# EAGLE board backplane-5 (EAGLE 8.3.1)
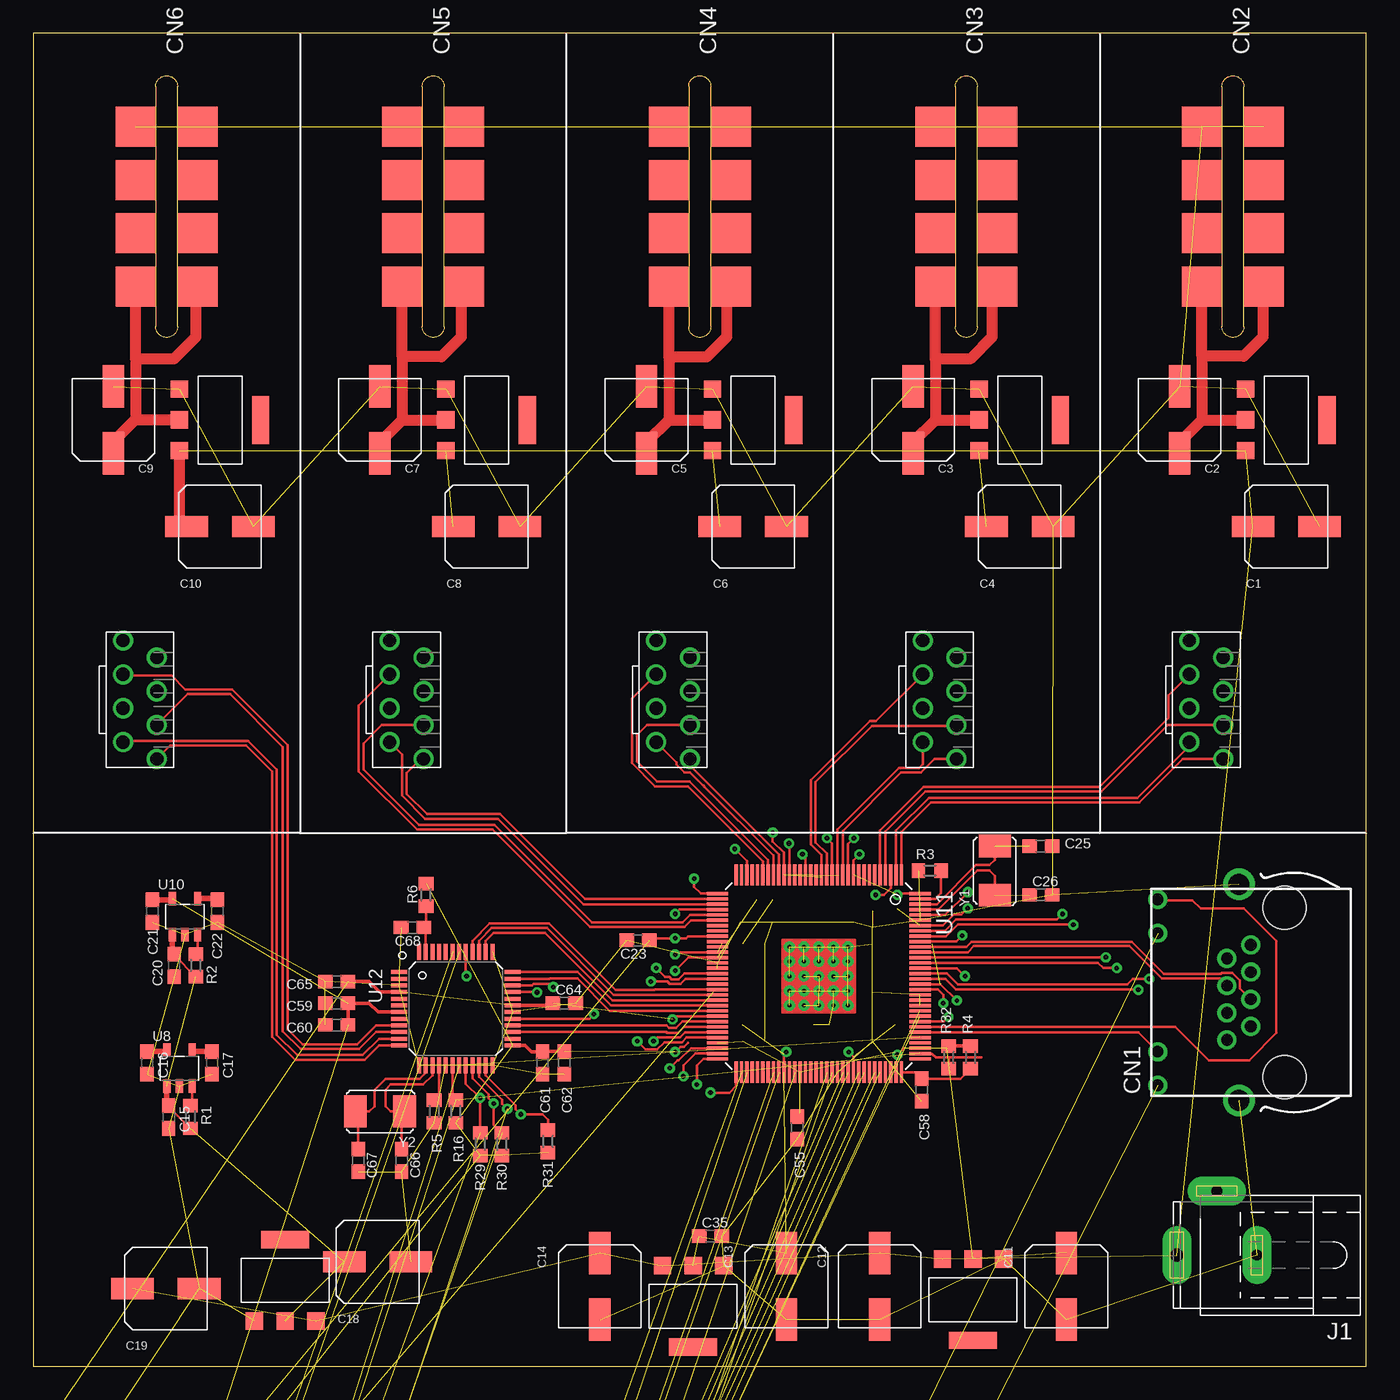
[diagram p0: board, top side]
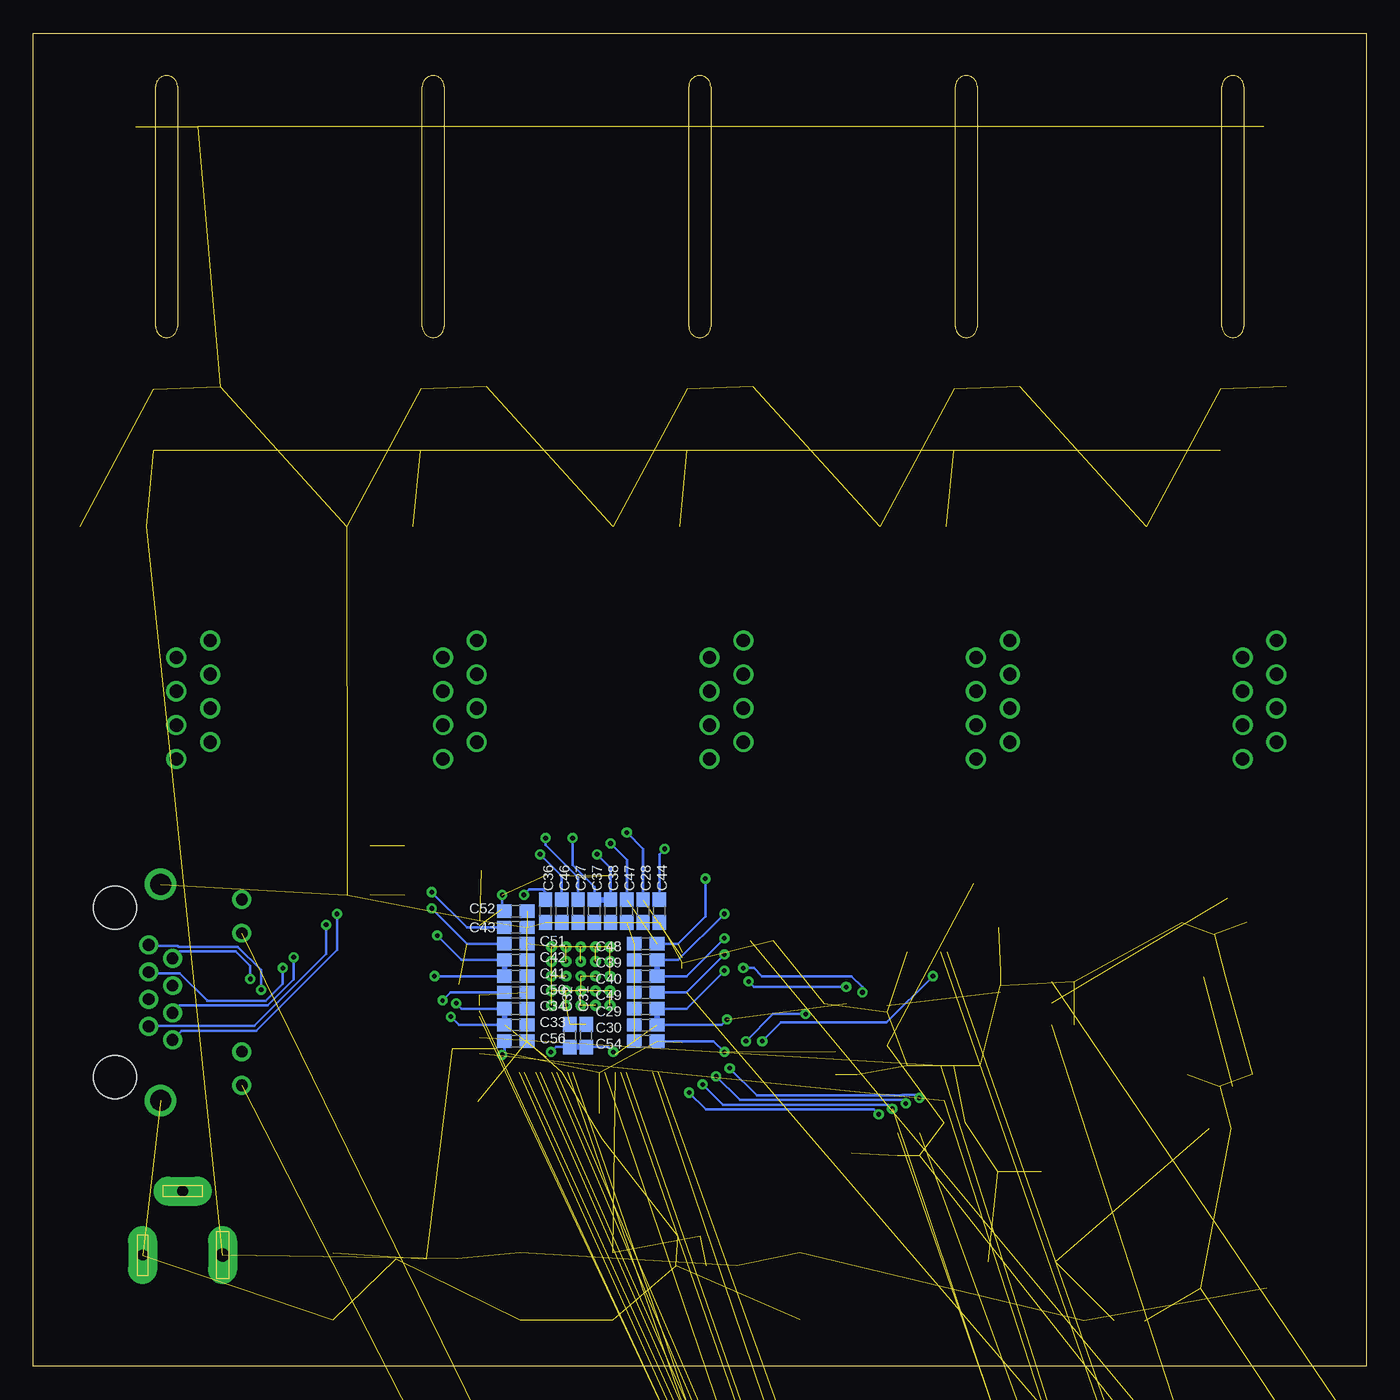
[diagram p1: board, bottom side, seen from below]

Size 100 x 100 mm. Coordinates in mm from the lower left corner, seen from the top.
Outline: 0,0 100,0 100,100 0,100 0,0
Copper layers (1*16): Top 0.035mm / dielectric 1.5mm / Bottom 0.035mm
Design rules "default *": minimum track width 8mil, minimum drill 0.35mm, track to track 6mil, track to pad 6mil, pad to pad 6mil, via to via 6mil, smd to smd 6mil, copper to edge 10mil, drill to drill 6mil, minimum pad ring 10mil, minimum via ring 8mil, stop-mask expansion 4mil, vias tented up to drill 0mil, thermal gap 10mil

## Footprints (pad centres in the part's own frame; a part is rotated, then mirrored left to right if it is on the bottom)
CAP-D6.3 = smd 3.2 x 1.6: N 2.5,0; P -2.5,0
C0603 = smd 1.1 x 1: 1 -0.85,0; 2 0.85,0
0603 = smd 1.1 x 1: 1 -0.85,0; 2 0.85,0
0805 = smd 1.3 x 1.5: 1 -0.95,0; 2 0.95,0
RJ45JACK90 = drill 0.889 pad 1.422: 1 3.556,2.54; 2 2.54,4.318; 3 1.524,2.54; 4 0.508,4.318; 5 -0.508,2.54; 6 -1.524,4.318; 7 -2.54,2.54; 8 -3.556,4.318; 9 -6.985,9.525; 10 -4.445,9.525; 11 4.445,9.525; 12 6.985,9.525 | drill 1.575 pad 2.286: S@1 -8.103,3.429; S@2 8.103,3.429 | hole 3.251: 6.35,0; -6.35,0
4PINCONN-FEMALE-1.6 = smd 3 x 3: 1@1 -6,-2.325; 1@2 -6,2.325; 2@1 -2,-2.325; 2@2 -2,2.325; 3@1 2,-2.325; 3@2 2,2.325; 4@1 6,-2.325; 4@2 6,2.325
SPC4077 = drill 0.8 pad 2.184 long: 1 -3,0; 2 0,-4.8 | drill 1 pad 2.184 long: 3 3,0
1X03 = drill 1.016 long: 1 -2.54,0; 2 0,0; 3 2.54,0
1210 = smd 1.6 x 2.7: 1 -1.4,0; 2 1.4,0
CHIPLED_0603 = smd 0.8 x 0.8: A 0,-0.75; C 0,0.75
R0603 = smd 1 x 1.1: 1 -0.85,0; 2 0.85,0
RJ45MALE = drill 1: 1 -4.445,-1.27; 2 -3.175,1.27; 3 -1.905,-1.27; 4 -0.635,1.27; 5 0.635,-1.27; 6 1.905,1.27; 7 3.175,-1.27; 8 4.445,1.27
SB = smd 0.787 x 0.787: 1 -1.448,0; 2 0,0; 3 1.448,0
SOT223 = smd 1.3 x 1.3: 1 -2.3,-3.05; 2 0,-3.05; 3 2.3,-3.05 | smd 3.6 x 1.3: 4 0,3.05
SOT23-5 = smd 0.55 x 1: 1 -0.95,-1.35; 2 0,-1.35; 3 0.95,-1.35; 4 0.95,1.35; 5 -0.95,1.35
TQFP-128 = smd 1.6 x 0.25: P$1 -7.6,6.2; P$2 -7.6,5.8; P$3 -7.6,5.4; P$4 -7.6,5; P$5 -7.6,4.6; P$6 -7.6,4.2; P$7 -7.6,3.8; P$8 -7.6,3.4; P$9 -7.6,3; P$10 -7.6,2.6; P$11 -7.6,2.2; P$12 -7.6,1.8; P$13 -7.6,1.4; P$14 -7.6,1; P$15 -7.6,0.6; P$16 -7.6,0.2; P$17 -7.6,-0.2; P$18 -7.6,-0.6; P$19 -7.6,-1; P$20 -7.6,-1.4; P$21 -7.6,-1.8; P$22 -7.6,-2.2; P$23 -7.6,-2.6; P$24 -7.6,-3; P$25 -7.6,-3.4; P$26 -7.6,-3.8; P$27 -7.6,-4.2; P$28 -7.6,-4.6; P$29 -7.6,-5; P$30 -7.6,-5.4; P$31 -7.6,-5.8; P$32 -7.6,-6.2; P$65 7.2,-6.2; P$66 7.2,-5.8; P$67 7.2,-5.4; P$68 7.2,-5; P$69 7.2,-4.6; P$70 7.2,-4.2; P$71 7.2,-3.8; P$72 7.2,-3.4; P$73 7.2,-3; P$74 7.2,-2.6; P$75 7.2,-2.2; P$76 7.2,-1.8; P$77 7.2,-1.4; P$78 7.2,-1; P$79 7.2,-0.6; P$80 7.2,-0.2; P$81 7.2,0.2; P$82 7.2,0.6; P$83 7.2,1; P$84 7.2,1.4; P$85 7.2,1.8; P$86 7.2,2.2; P$87 7.2,2.6; P$88 7.2,3; P$89 7.2,3.4; P$90 7.2,3.8; P$91 7.2,4.2; P$92 7.2,4.6; P$93 7.2,5; P$94 7.2,5.4; P$95 7.2,5.8; P$96 7.2,6.2 | smd 0.25 x 1.6: P$33 -6.2,-7.6; P$34 -5.8,-7.6; P$35 -5.4,-7.6; P$36 -5,-7.6; P$37 -4.6,-7.6; P$38 -4.2,-7.6; P$39 -3.8,-7.6; P$40 -3.4,-7.6; P$41 -3,-7.6; P$42 -2.6,-7.6; P$43 -2.2,-7.6; P$44 -1.8,-7.6; P$45 -1.4,-7.6; P$46 -1,-7.6; P$47 -0.6,-7.6; P$48 -0.2,-7.6; P$49 0.2,-7.6; P$50 0.6,-7.6; P$51 1,-7.6; P$52 1.4,-7.6; P$53 1.8,-7.6; P$54 2.2,-7.6; P$55 2.6,-7.6; P$56 3,-7.6; P$57 3.4,-7.6; P$58 3.8,-7.6; P$59 4.2,-7.6; P$60 4.6,-7.6; P$61 5,-7.6; P$62 5.4,-7.6; P$63 5.8,-7.6; P$64 6.2,-7.6; P$97 6.2,7.6; P$98 5.8,7.6; P$99 5.4,7.6; P$100 5,7.6; P$101 4.6,7.6; P$102 4.2,7.6; P$103 3.8,7.6; P$104 3.4,7.6; P$105 3,7.6; P$106 2.6,7.6; P$107 2.2,7.6; P$108 1.8,7.6; P$109 1.4,7.6; P$110 1,7.6; P$111 0.6,7.6; P$112 0.2,7.6; P$113 -0.2,7.6; P$114 -0.6,7.6; P$115 -1,7.6; P$116 -1.4,7.6; P$117 -1.8,7.6; P$118 -2.2,7.6; P$119 -2.6,7.6; P$120 -3,7.6; P$121 -3.4,7.6; P$122 -3.8,7.6; P$123 -4.2,7.6; P$124 -4.6,7.6; P$125 -5,7.6; P$126 -5.4,7.6; P$127 -5.8,7.6; P$128 -6.2,7.6 | drill 0.3: P$129 0,0; P$130 1.1,0; P$131 2.2,0; P$132 -1.1,0; P$133 -2.2,0; P$134 0,1.1; P$135 0,2.2; P$136 -1.1,2.2; P$137 -2.2,2.2; P$138 -2.2,1.1; P$139 -1.1,1.1; P$140 1.1,2.2; P$141 1.1,1.1; P$142 2.2,2.2; P$143 2.2,1.1; P$144 2.2,-1.1; P$145 1.1,-1.1; P$146 0,-1.1; P$147 -1.1,-1.1; P$148 -2.2,-1.1; P$149 -2.2,-2.2; P$150 -1.1,-2.2; P$151 0,-2.2; P$152 1.1,-2.2; P$153 2.2,-2.2
LQFP-48 = smd 0.3 x 1.2: 1 -2.75,-4.25; 2 -2.25,-4.25; 3 -1.75,-4.25; 4 -1.25,-4.25; 5 -0.75,-4.25; 6 -0.25,-4.25; 7 0.25,-4.25; 8 0.75,-4.25; 9 1.25,-4.25; 10 1.75,-4.25; 11 2.25,-4.25; 12 2.75,-4.25; 25 2.75,4.25; 26 2.25,4.25; 27 1.75,4.25; 28 1.25,4.25; 29 0.75,4.25; 30 0.25,4.25; 31 -0.25,4.25; 32 -0.75,4.25; 33 -1.25,4.25; 34 -1.75,4.25; 35 -2.25,4.25; 36 -2.75,4.25 | smd 1.2 x 0.3: 13 4.25,-2.75; 14 4.25,-2.25; 15 4.25,-1.75; 16 4.25,-1.25; 17 4.25,-0.75; 18 4.25,-0.25; 19 4.25,0.25; 20 4.25,0.75; 21 4.25,1.25; 22 4.25,1.75; 23 4.25,2.25; 24 4.25,2.75; 37 -4.25,2.75; 38 -4.25,2.25; 39 -4.25,1.75; 40 -4.25,1.25; 41 -4.25,0.75; 42 -4.25,0.25; 43 -4.25,-0.25; 44 -4.25,-0.75; 45 -4.25,-1.25; 46 -4.25,-1.75; 47 -4.25,-2.25; 48 -4.25,-2.75
LQFP-100 = smd 0.3 x 1.2: 1 -6,-7.75; 2 -5.5,-7.75; 3 -5,-7.75; 4 -4.5,-7.75; 5 -4,-7.75; 6 -3.5,-7.75; 7 -3,-7.75; 8 -2.5,-7.75; 9 -2,-7.75; 10 -1.5,-7.75; 11 -1,-7.75; 12 -0.5,-7.75; 13 0,-7.75; 14 0.5,-7.75; 15 1,-7.75; 16 1.5,-7.75; 17 2,-7.75; 18 2.5,-7.75; 19 3,-7.75; 20 3.5,-7.75; 21 4,-7.75; 22 4.5,-7.75; 23 5,-7.75; 24 5.5,-7.75; 25 6,-7.75; 51 6,7.75; 52 5.5,7.75; 53 5,7.75; 54 4.5,7.75; 55 4,7.75; 56 3.5,7.75; 57 3,7.75; 58 2.5,7.75; 59 2,7.75; 60 1.5,7.75; 61 1,7.75; 62 0.5,7.75; 63 0,7.75; 64 -0.5,7.75; 65 -1,7.75; 66 -1.5,7.75; 67 -2,7.75; 68 -2.5,7.75; 69 -3,7.75; 70 -3.5,7.75; 71 -4,7.75; 72 -4.5,7.75; 73 -5,7.75; 74 -5.5,7.75; 75 -6,7.75 | smd 1.2 x 0.3: 26 7.75,-6; 27 7.75,-5.5; 28 7.75,-5; 29 7.75,-4.5; 30 7.75,-4; 31 7.75,-3.5; 32 7.75,-3; 33 7.75,-2.5; 34 7.75,-2; 35 7.75,-1.5; 36 7.75,-1; 37 7.75,-0.5; 38 7.75,0; 39 7.75,0.5; 40 7.75,1; 41 7.75,1.5; 42 7.75,2; 43 7.75,2.5; 44 7.75,3; 45 7.75,3.5; 46 7.75,4; 47 7.75,4.5; 48 7.75,5; 49 7.75,5.5; 50 7.75,6; 76 -7.75,6; 77 -7.75,5.5; 78 -7.75,5; 79 -7.75,4.5; 80 -7.75,4; 81 -7.75,3.5; 82 -7.75,3; 83 -7.75,2.5; 84 -7.75,2; 85 -7.75,1.5; 86 -7.75,1; 87 -7.75,0.5; 88 -7.75,0; 89 -7.75,-0.5; 90 -7.75,-1; 91 -7.75,-1.5; 92 -7.75,-2; 93 -7.75,-2.5; 94 -7.75,-3; 95 -7.75,-3.5; 96 -7.75,-4; 97 -7.75,-4.5; 98 -7.75,-5; 99 -7.75,-5.5; 100 -7.75,-6
XTAL-2-SMD = smd 1.7 x 2.4: P$1 -1.85,0; P$2 1.85,0

## Placement (x,y rotation side)
C1  100uF  [CAP-D6.3]  94,63 0 top
C2  100uF  [CAP-D6.3]  86,71 90 top
C3  100uF  [CAP-D6.3]  66,71 90 top
C4  100uF  [CAP-D6.3]  74,63 0 top
C5  100uF  [CAP-D6.3]  46,71 90 top
C6  100uF  [CAP-D6.3]  54,63 0 top
C7  100uF  [CAP-D6.3]  26,71 90 top
C8  100uF  [CAP-D6.3]  34,63 0 top
C9  100uF  [CAP-D6.3]  6,71 90 top
C10  100uF  [CAP-D6.3]  14,63 0 top
C11  100uF  [CAP-D6.3]  77.5,6 270 top
C12  100uF  [CAP-D6.3]  63.5,6 270 top
C13  100uF  [CAP-D6.3]  56.5,6 270 top
C14  100uF  [CAP-D6.3]  42.5,6 270 top
C15  1uF  [C0603]  10.16,18.69 270 top
C16  1uF  [C0603]  8.53,22.76 270 top
C17  22nF  [C0603]  13.41,22.76 270 top
C18  100uF  [CAP-D6.3]  25.83,7.83 0 top
C19  100uF  [CAP-D6.3]  9.94,5.83 0 top
C20  1uF  [C0603]  10.57,30.07 270 top
C21  1uF  [C0603]  8.94,34.14 270 top
C22  22nF  [C0603]  13.82,34.14 270 top
C23  220uF  [0603]  45.36,31.95 180 top
C24  220uF  [0603]  -77.47,-128.27 0 top  (outside the outline)
C25  2pF  [0603]  75.59,39.01 0 top
C26  2pF  [0603]  75.59,35.36 0 top
C27  0.1uF  [0603]  59.13,34.14 270 bottom
C28  0.1uF  [0603]  54.25,34.14 270 bottom
C29  0.1uF  [0603]  54.05,26.82 180 bottom
C30  0.1uF  [0603]  54.05,25.6 180 bottom
C31  0.1uF  [0603]  58.52,24.79 90 bottom
C32  0.1uF  [0603]  59.74,24.79 90 bottom
C33  0.1uF  [0603]  63.8,25.6 0 bottom
C34  0.1uF  [0603]  63.8,26.82 0 bottom
C35  22uF  [0603]  50.8,9.75 0 top
C36  0.1uF  [0603]  61.57,34.14 270 bottom
C37  0.1uF  [0603]  57.91,34.14 270 bottom
C38  0.1uF  [0603]  56.69,34.14 270 bottom
C39  0.1uF  [0603]  54.05,30.48 180 bottom
C40  0.1uF  [0603]  54.05,29.26 180 bottom
C41  0.1uF  [0603]  63.8,29.26 0 bottom
C42  0.1uF  [0603]  63.8,30.48 0 bottom
C43  0.1uF  [0603]  63.8,32.92 0 bottom
C44  0.1uF  [0603]  53.04,34.14 270 bottom
C45  22uF  [0603]  -85.09,-219.71 0 top  (outside the outline)
C46  0.1uF  [0603]  60.35,34.14 270 bottom
C47  0.1uF  [0603]  55.47,34.14 270 bottom
C48  0.1uF  [0603]  54.05,31.7 180 bottom
C49  0.1uF  [0603]  54.05,28.04 180 bottom
C50  0.1uF  [0603]  63.8,28.04 0 bottom
C51  0.1uF  [0603]  63.8,31.7 0 bottom
C52  0.1uF  [0603]  63.8,34.14 0 bottom
C53  22uF  [0603]  -77.47,-240.03 0 top  (outside the outline)
C54  0.1uF  [0603]  54.05,24.38 180 bottom
C55  0.1uF  [0603]  57.3,17.88 270 top
C56  0.1uF  [0603]  63.8,24.38 0 bottom
C57  10uF  [0603]  -77.47,-250.19 0 top  (outside the outline)
C58  2pF  [0603]  66.65,20.73 270 top
C59  100n  [0603]  22.76,27.23 180 top
C60  22uF  [0603]  22.76,25.6 180 top
C61  100n  [0603]  38.2,22.76 270 top
C62  22uF  [0603]  39.83,22.76 270 top
C63  2.2uF  [0603]  -97.79,-285.75 0 top  (outside the outline)
C64  100nF  [0603]  39.83,27.23 0 top
C65  100nF  [0603]  22.76,28.85 180 top
C66  22pF  [0603]  27.64,15.44 270 top
C67  22pF  [0603]  24.38,15.44 270 top
C68  10uF  [0603]  28.45,32.92 180 top
C69  8pF  [0603]  -151.18,-538.07 0 top  (outside the outline)
C70  8pF  [0603]  -151.18,-541.73 0 top  (outside the outline)
C71  100nF  [0603]  -151.18,-546.61 0 top  (outside the outline)
C72  10nF  [0603]  -151.18,-551.48 0 top  (outside the outline)
C73  10nF  [0603]  -151.18,-556.36 0 top  (outside the outline)
C74  10nF  [0603]  -151.18,-561.24 0 top  (outside the outline)
C75  10nF  [0603]  -151.18,-566.12 0 top  (outside the outline)
C76  10nF  [0603]  -151.18,-570.99 0 top  (outside the outline)
C77  10nF  [0603]  -151.18,-575.87 0 top  (outside the outline)
C78  10nF  [0603]  -151.18,-580.75 0 top  (outside the outline)
C79  10nF  [0603]  -151.18,-585.62 0 top  (outside the outline)
C80  2.2uF  [0805]  -151.18,-590.5 0 top  (outside the outline)
C81  2.2uF  [0805]  -151.79,-596.8 0 top  (outside the outline)
CN1  RJ45JACK90  [RJ45JACK90]  93.88,28.04 90 top
CN2  4PINCONNFEMALE-1.6  [4PINCONN-FEMALE-1.6]  90,87 90 top
CN3  4PINCONNFEMALE-1.6  [4PINCONN-FEMALE-1.6]  70,87 90 top
CN4  4PINCONNFEMALE-1.6  [4PINCONN-FEMALE-1.6]  50,87 90 top
CN5  4PINCONNFEMALE-1.6  [4PINCONN-FEMALE-1.6]  30,87 90 top
CN6  4PINCONNFEMALE-1.6  [4PINCONN-FEMALE-1.6]  10,87 90 top
J1  [SPC4077]  88.8,8.33 180 top
JP1  [1X03]  -137.16,-509.27 0 top  (outside the outline)
L1  220nH  [1210]  -77.47,-118.11 0 top  (outside the outline)
L2  220nH  [1210]  -77.47,-123.19 0 top  (outside the outline)
LED1  [CHIPLED_0603]  -110.49,-420.37 0 top  (outside the outline)
LED2  [CHIPLED_0603]  -115.57,-420.37 0 top  (outside the outline)
LED3  [CHIPLED_0603]  -120.65,-420.37 0 top  (outside the outline)
LED4  [CHIPLED_0603]  -125.73,-420.37 0 top  (outside the outline)
LED5  [CHIPLED_0603]  -130.81,-420.37 0 top  (outside the outline)
LED6  [CHIPLED_0603]  -135.89,-420.37 0 top  (outside the outline)
LED7  [CHIPLED_0603]  -140.97,-420.37 0 top  (outside the outline)
LED8  [CHIPLED_0603]  -146.05,-420.37 0 top  (outside the outline)
LED9  [CHIPLED_0603]  -139.7,-473.71 0 top  (outside the outline)
LED10  [CHIPLED_0603]  -146.05,-468.63 0 top  (outside the outline)
R1  1k  [R0603]  11.79,18.69 270 top
R2  1k  [R0603]  12.19,30.07 270 top
R3  6.04k/1%  [R0603]  67.26,37.19 0 top
R4  10k  [R0603]  70.31,23.16 90 top
R5  6.49k/1%  [R0603]  30.07,19.1 90 top
R6  10k  [R0603]  29.46,35.36 90 top
R7  100  [R0603]  -105.41,-351.79 0 top  (outside the outline)
R8  100  [R0603]  -105.41,-356.87 0 top  (outside the outline)
R9  1k  [R0603]  -105.41,-364.49 0 top  (outside the outline)
R10  4k7  [R0603]  -105.41,-369.57 0 top  (outside the outline)
R11  1k  [R0603]  -105.41,-374.65 0 top  (outside the outline)
R12  4k7  [R0603]  -105.41,-379.73 0 top  (outside the outline)
R13  1k  [R0603]  -105.41,-387.35 0 top  (outside the outline)
R14  4k7  [R0603]  -105.41,-392.43 0 top  (outside the outline)
R15  1k  [R0603]  -105.41,-400.05 0 top  (outside the outline)
R16  1k  [R0603]  31.7,19.1 270 top
R17  10  [R0603]  -146.05,-425.45 0 top  (outside the outline)
R18  10  [R0603]  -146.05,-430.53 0 top  (outside the outline)
R19  10  [R0603]  -146.05,-435.61 0 top  (outside the outline)
R20  10  [R0603]  -146.05,-440.69 0 top  (outside the outline)
R21  10  [R0603]  -146.05,-445.77 0 top  (outside the outline)
R22  10  [R0603]  -146.05,-450.85 0 top  (outside the outline)
R23  10  [R0603]  -146.05,-455.93 0 top  (outside the outline)
R24  10  [R0603]  -146.05,-461.01 0 top  (outside the outline)
R25  10  [R0603]  -142.24,-466.09 0 top  (outside the outline)
R26  10  [R0603]  -146.05,-473.71 0 top  (outside the outline)
R27  1k  [R0603]  -146.05,-478.79 0 top  (outside the outline)
R28  1k  [R0603]  -146.05,-483.87 0 top  (outside the outline)
R29  1k  [R0603]  33.53,16.66 90 top
R30  1k  [R0603]  35.15,16.66 90 top
R31  1k  [R0603]  38.61,16.87 90 top
R32  1k  [R0603]  68.68,23.16 90 top
RJ1  RJ45PLUG  [RJ45MALE]  88,50 270 top
RJ2  RJ45PLUG  [RJ45MALE]  68,50 270 top
RJ3  RJ45PLUG  [RJ45MALE]  48,50 270 top
RJ4  RJ45PLUG  [RJ45MALE]  28,50 270 top
RJ5  RJ45PLUG  [RJ45MALE]  8,50 270 top
SB1  SB  [SB]  -104.14,-360.68 0 top  (outside the outline)
SB2  SB  [SB]  -104.14,-383.54 0 top  (outside the outline)
SB3  SB  [SB]  -104.14,-396.24 0 top  (outside the outline)
U1  AMS1117-5.0  [SOT223]  94,71 270 top
U2  AMS1117-5.0  [SOT223]  74,71 270 top
U3  AMS1117-5.0  [SOT223]  54,71 270 top
U4  AMS1117-5.0  [SOT223]  34,71 270 top
U5  AMS1117-5.0  [SOT223]  14,71 270 top
U6  AMS1117-2.5  [SOT223]  70.5,5 180 top
U7  AMS1117-1.2  [SOT223]  49.5,4.5 180 top
U8  RT9193  [SOT23-5]  10.97,22.35 0 top
U9  AMS1117-5.0  [SOT223]  18.89,6.45 0 top
U10  RT9193  [SOT23-5]  11.38,33.73 0 top
U11  KSZ9897  [TQFP-128]  58.93,29.26 270 top
U12  KSZ8081MLX  [LQFP-48]  31.7,26.82 270 top
U13  STM32F217-100  [LQFP-100]  -138.38,-526.29 0 top  (outside the outline)
Y1  25MHz  [XTAL-2-SMD]  72.14,37.19 90 top
Y2  25MHz  [XTAL-2-SMD]  26.01,19.1 180 top
Y3  25MHz  [XTAL-2-SMD]  -150.77,-531.37 0 top  (outside the outline)

## Library data of the parts
C1-C14 C18 C19 C23-C81 CN2-CN6 L1 L2 RJ1-RJ5 SB1-SB3 U1-U13 Y1-Y3 = tuetuopay
C15-C17 C20-C22 R1-R32 = rcl
CN1 = tuetuopay; MF: MOLEX; MPN: 0446200002; OC_FARNELL: 9251910
J1 = tuetuopay; OC_FARNELL: unknown; OC_NEWARK: unknown
JP1 = pinhead
LED1-LED10 = led

## Nets
1V2: C13.P C27.1 C28.1 C29.1 C30.1 C31.1 C32.1 C33.1 C34.1 C35.1 C63.1 C64.1 C65.1 L1.2 U7.2 U11.P$11 U11.P$23 U11.P$45 U11.P$56 U11.P$74 U11.P$87 U11.P$104 U11.P$110 U12.4 U12.31
1V2-A: C23.1 C36.1 C37.1 C38.1 C39.1 C40.1 C41.1 C42.1 C43.1 C44.1 C45.1 L1.1 U11.P$3 U11.P$14 U11.P$19 U11.P$30 U11.P$36 U11.P$41 U11.P$114 U11.P$119 U11.P$124
2V5-A: C24.1 C46.1 C47.1 C48.1 C49.1 C50.1 C51.1 C52.1 C53.1 L2.1 U11.P$10 U11.P$22 U11.P$33 U11.P$44 U11.P$111 U11.P$122 U11.P$128
3V3-PHY: C21.1 C59.1 C60.1 R10.2 R12.2 R14.2 U10.5 U12.7
3V3-STM32: C16.1 U8.5
5V-1: C2.P CN2.1@1 CN2.1@2 U1.2
5V-2: C3.P CN3.1@1 CN3.1@2 U2.2
5V-3: C5.P CN4.1@1 CN4.1@2 U3.2
5V-4: C7.P CN5.1@1 CN5.1@2 U4.2
5V-5: C9.P CN6.1@1 CN6.1@2 U5.2
+5V: C15.1 C18.P C20.1 R1.2 R2.2 U8.1 U9.2 U10.1
+12V: C1.P C4.P C6.P C8.P C10.P C12.P C14.P C19.P J1.3 U1.3 U2.3 U3.3 U4.3 U5.3 U6.3 U7.3 U9.3
GND: C1.N C2.N C3.N C4.N C5.N C6.N C7.N C8.N C9.N C10.N C11.N C12.N C13.N C14.N C15.2 C16.2 C17.2 C18.N C19.N C20.2 C21.2 C22.2 C23.2 C24.2 C25.2 C26.2 C27.2 C28.2 C29.2 C30.2 C31.2 C32.2 C33.2 C34.2 C35.2 C36.2 C37.2 C38.2 C39.2 C40.2 C41.2 C42.2 C43.2 C44.2 C45.2 C46.2 C47.2 C48.2 C49.2 C50.2 C51.2 C52.2 C53.2 C54.2 C55.2 C56.2 C57.2 C58.2 C59.2 C60.2 C61.2 C62.2 C63.2 C64.2 C65.2 C66.2 C67.2 C68.2 C69.2 C70.2 C71.2 C72.2 C73.2 C74.2 C75.2 C76.2 C77.2 C78.2 C79.2 C80.2 C81.2 CN1.S@1 CN1.S@2 CN2.4@1 CN2.4@2 CN3.4@1 CN3.4@2 CN4.4@1 CN4.4@2 CN5.4@1 CN5.4@2 CN6.4@1 CN6.4@2 J1.1 JP1.3 R3.1 R5.1 R9.1 R11.1 R13.1 R15.1 R27.2 R28.2 U1.1 U2.1 U3.1 U4.1 U5.1 U6.1 U7.1 U8.2 U9.1 U10.2 U11.P$46 U11.P$47 U11.P$84 U11.P$107 U11.P$109 U11.P$123 U11.P$129 U11.P$130 U11.P$131 U11.P$132 U11.P$133 U11.P$134 U11.P$135 U11.P$136 U11.P$137 U11.P$138 U11.P$139 U11.P$140 U11.P$141 U11.P$142 U11.P$143 U11.P$144 U11.P$145 U11.P$146 U11.P$147 U11.P$148 U11.P$149 U11.P$150 U11.P$151 U11.P$152 U11.P$153 U12.1 U12.2 U12.3 U12.13 U12.17 U12.24 U12.30 U12.37 U13.10 U13.20 U13.27 U13.74
MDC: JP1.2 U11.P$101 U12.19 U13.16
MDIO: JP1.1 R16.1 R32.1 U11.P$98 U12.18 U13.25
N$1: C17.1 U8.4
N$2: R1.1 U8.3
N$3: C22.1 U10.4
N$4: R2.1 U10.3
N$5: C25.1 U11.P$126 Y1.P$2
N$6: C26.1 U11.P$125 Y1.P$1
N$7: R3.2 U11.P$127
N$8: C58.1 R4.1 U11.P$96
N$9: C66.1 U12.15 Y2.P$1
N$10: C67.1 U12.14 Y2.P$2
N$11: R5.2 U12.16
N$12: C68.1 R6.1 U12.47
N$13: CN1.9 R7.1
N$14: CN1.11 R8.1
N$15: R11.2 SB2.1
N$16: R9.2 SB1.1
N$17: R10.1 SB1.3
N$18: R12.1 SB2.3
N$19: R13.2 SB3.1
N$20: R14.1 SB3.3
N$21: C69.1 U13.13 Y3.P$1
N$22: C70.1 U13.12 Y3.P$2
N$23: C71.1 U13.14
N$24: LED1.C R17.1
N$25: LED2.C R18.1
N$26: LED3.C R19.1
N$27: LED4.C R20.1
N$28: LED5.C R21.1
N$29: LED6.C R22.1
N$30: LED7.C R23.1
N$31: LED8.C R24.1
N$32: LED9.C R25.1
N$33: LED10.C R26.1
N$34: C80.1 U13.73
N$35: C81.1 U13.49
PHY1->PI1_N: RJ1.3 U11.P$5
PHY1->PI1_P: RJ1.6 U11.P$4
PHY1LED0: R17.2 U11.P$105
PHY1LED1: R18.2 U11.P$106
PHY2->PI2_N: RJ2.3 U11.P$16
PHY2->PI2_P: RJ2.6 U11.P$15
PHY2LED0: R19.2 U11.P$91
PHY2LED1: R20.2 U11.P$92
PHY3->PI3_N: RJ3.3 U11.P$27
PHY3->PI3_P: RJ3.6 U11.P$26
PHY3LED0: R21.2 U11.P$88
PHY3LED1: R22.2 R28.1 U11.P$89
PHY4->PI4_N: RJ4.3 U11.P$38
PHY4->PI4_P: RJ4.6 U11.P$37
PHY4LED0: R23.2 U11.P$85
PHY4LED1: R24.2 R27.1 U11.P$86
PHY5A_N: CN1.2 U11.P$113
PHY5A_P: CN1.1 U11.P$112
PHY5B_N: CN1.6 U11.P$116
PHY5B_P: CN1.3 U11.P$115
PHY5C_N: CN1.5 U11.P$118
PHY5C_P: CN1.4 U11.P$117
PHY5D_N: CN1.8 U11.P$121
PHY5D_P: CN1.7 U11.P$120
PHY5LED0: CN1.10 U11.P$102
PHY5LED1: CN1.12 U11.P$103
PHY6->PI5_N: RJ5.3 U12.9
PHY6->PI5_P: RJ5.6 U12.10
PHY6-COL: U11.P$51 U12.40
PHY6-CRS: U11.P$60 U12.41
PHY6-RXC: U11.P$57 U12.28
PHY6-RXD0: R31.2 U11.P$65 U12.23
PHY6-RXD1: SB3.2 U11.P$64 U12.22
PHY6-RXD2: R30.2 SB2.2 U11.P$63 U12.21
PHY6-RXD3: R29.2 SB1.2 U11.P$62 U12.20
PHY6-RXDV: U11.P$58 U12.27
PHY6-RXER: U11.P$59 U12.29
PHY6-TXC: U11.P$48 U12.33
PHY6-TXD0: U11.P$55 U12.35
PHY6-TXD1: U11.P$54 U12.36
PHY6-TXD2: U11.P$53 U12.38
PHY6-TXD3: U11.P$52 U12.39
PHY6-TXEN: U11.P$49 U12.34
PHY6LED0: R25.2 U12.42
PHY6LED1: R26.2 U12.43
PHY6RXD0: R15.2
PI1->PHY1_N: RJ1.7 U11.P$2
PI1->PHY1_P: RJ1.8 U11.P$1
PI2->PHY2_N: RJ2.7 U11.P$13
PI2->PHY2_P: RJ2.8 U11.P$12
PI3->PHY3_N: RJ3.7 U11.P$25
PI3->PHY3_P: RJ3.8 U11.P$24
PI4->PHY4_N: RJ4.7 U11.P$35
PI4->PHY4_P: RJ4.8 U11.P$34
PI5->PHY6_N: RJ5.7 U12.11
PI5->PHY6_P: RJ5.8 U12.12
STM32-ETH-CRSDV: U11.P$76 U13.32
STM32-ETH-REFCLK: U11.P$66 U13.24 U13.67
STM32-ETH-RXD0: U11.P$83 U13.33
STM32-ETH-RXD1: U11.P$82 U13.34
STM32-ETH-TXD0: U11.P$73 U13.51
STM32-ETH-TXD1: U11.P$72 U13.52
STM32-ETH-TXEN: U11.P$67 U13.48
VCCIO: C11.P C54.1 C55.1 C56.1 C57.1 C61.1 C62.1 C72.1 C73.1 C74.1 C75.1 C76.1 C77.1 C78.1 C79.1 L2.2 LED1.A LED2.A LED3.A LED4.A LED5.A LED6.A LED7.A LED8.A LED9.A LED10.A R4.2 R6.2 R7.2 R8.2 R16.2 R29.1 R30.1 R31.1 R32.2 U6.2 U11.P$61 U11.P$77 U11.P$99 U12.25 U13.11 U13.19 U13.21 U13.22 U13.28 U13.50 U13.75 U13.100

## Tracks (layer width: path | path; a pad name or v marks a point on that pad's centre or on a via)
1V2  (via drill 0.33, 0.35)  (11 unrouted)
  Top 0.203: U11.P$110 67.85,28.26 68.28,27.84 v68.28,27.23 | U11.P$45 49.15,30.66 v48.16,29.67 | U11.P$23 56.31,36.88 56.31,38.53 55.47,39.36 v55.47,40.03 | U11.P$11 61.13,39.18 v61.57,39.62 | U11.P$74 56.33,23.41 v56.49,23.57 | U11.P$87 61.53,23.21 v61.16,23.57 | U11.P$56 48.21,26.26 v47.95,26.01 | U11.P$104 68.33,25.86 v68.68,26.21
  Top 0.254: U12.4 25.98,28.07 25.2,28.85 C65.1 | U12.31 38.82,27.07 C64.1
  Bottom 0.203: C34.1 67.87,26.82 v68.28,27.23 | C29.1 51,26.82 v48.16,29.67 | C28.1 54.25,38.81 v55.47,40.03 | C27.1 59.13,36.68 61.57,39.12 v61.57,39.62 | v47.95,26.01 48.36,25.6 C30.1 | C31.1 56.86,23.94 v56.49,23.57 | C32.1 60.79,23.94 v61.16,23.57 | C33.1 68.07,25.6 v68.68,26.21
  Bottom 0.406: C34.1 C33.1 | C29.1 C30.1 | C31.1 C32.1
1V2-A  (via drill 0.35)  (2 unrouted)
  Top 0.203: U11.P$114 69.3,29.86 v69.9,29.26 | U11.P$119 69.25,31.86 v69.7,32.31 | U11.P$124 68.41,33.86 v70.1,35.56 | U11.P$41 49.13,32.26 48.97,32.11 v48.16,32.11 46.37,32.11 C23.1 | U11.P$30 53.53,37.91 v52.63,38.81 | U11.P$19 57.93,38.19 v57.71,38.41 | U11.P$14 59.93,39.23 v59.54,39.62 | U11.P$3 64.33,35.88 63.8,35.36 v63.2,35.36 | U11.P$36 48.48,34.26 v48.16,33.93
  Bottom 0.203: v69.9,29.26 C41.1 | C42.1 67.87,30.48 v69.7,32.31 | C40.1 51,29.26 v48.16,32.11 | C44.1 53.03,38.41 v52.63,38.81 | C38.1 56.69,37.39 v57.71,38.41 | C37.1 57.91,35.97 59.54,37.59 v59.54,39.62 | C36.1 61.57,35.56 61.77,35.76 62.79,35.76 v63.2,35.36 | C43.1 67.46,32.92 v70.1,35.56 | v48.16,33.93 51.61,30.48 C39.1
  Bottom 0.406: C41.1 C42.1 | C37.1 C38.1 | C40.1 C39.1
2V5-A  (via drill 0.33, 0.35)  (9 unrouted)
  Top 0.203: U11.P$111 68.06,28.66 v69.29,27.43 | U11.P$128 64.92,35.46 v64.82,35.36 | U11.P$122 68.24,33.06 69.06,33.88 69.65,33.88 v70.1,34.34 | U11.P$44 48.33,31.06 v48.16,30.89 | U11.P$33 50.09,35.46 49.58,35.97 v49.58,36.58 | U11.P$22 56.73,39.18 v56.69,39.22 | U11.P$10 61.53,37.96 v61.98,38.41
  Bottom 0.203: C50.1 68.68,28.04 v69.29,27.43 | C52.1 64.82,34.3 v64.82,35.36 | C49.1 51,28.04 v48.16,30.89 | C48.1 51.61,31.7 49.58,33.73 v49.58,36.58 | C47.1 55.47,38 v56.69,39.22 | C46.1 60.35,36.78 v61.98,38.41 | C51.1 67.46,31.7 v70.1,34.34
3V3-PHY  (4 unrouted)
  Top 0.254: U12.7 25.85,26.57 25.2,27.23 C59.1 C60.1
  Top 0.406: C21.1 10.34,34.99 U10.5
3V3-STM32
  Top 0.406: C16.1 9.93,23.61 U8.5
5V-1
  Top 0.813: 87.67,75.77 CN2.1@2 | 87.67,75.77 87.67,71 | 87.67,71 U1.2 | 87.67,71 86,69.33 C2.P | CN2.1@1 92.25,80.93 92.25,77.22 90.8,75.77 87.67,75.77
5V-2
  Top 0.813: 67.67,75.58 CN3.1@2 | 67.67,75.58 67.67,71 | 67.67,71 U2.2 | 67.67,71 66,69.33 C3.P | CN3.1@1 71.93,80.61 71.93,77.22 70.29,75.58 67.67,75.58
5V-3
  Top 0.813: 47.67,75.71 CN4.1@2 | 47.67,75.71 47.67,71 | 47.67,71 U3.2 | 47.67,71 46,69.33 C5.P | CN4.1@1 52.02,80.69 52.02,77.22 50.52,75.71 47.67,75.71
5V-4
  Top 0.813: 27.68,75.73 CN5.1@2 | 27.68,75.73 27.68,71 | 27.68,71 U4.2 | 27.68,71 26,69.33 C7.P | CN5.1@1 32.11,80.78 32.11,77.22 30.62,75.73 27.68,75.73
5V-5
  Top 0.813: 7.67,75.56 7.67,71.06 | 7.67,75.56 CN6.1@2 | C9.P 6.1,68.6 6.1,69.49 7.67,71.06 | U5.2 7.74,71 7.67,71.06 | CN6.1@1 12.19,80.87 12.19,77.22 10.53,75.56 7.67,75.56
+5V  (3 unrouted)
  Top 0.203: C15.1 10.16,19.47 R1.2 | C20.1 10.57,30.85 R2.2
  Top 0.406: U8.1 10.02,19.68 C15.1 | U10.1 10.43,31.06 C20.1
+12V  (15 unrouted)
  Top 0.813: U5.3 10.95,63.55 C10.P
GND  (155 unrouted)
MDC  (3 unrouted)
MDIO  (3 unrouted)
  Top 0.203: U11.P$98 66.55,23.44 67.43,23.44 67.71,23.16 68.68,23.16 | 68.68,23.16 71.12,23.16 | R32.1 68.68,23.16 | U12.18 31.45,20.2 R16.1
N$1
  Top 0.406: C17.1 12.02,23.61 U8.4
N$2
  Top 0.203: U8.3 11.92,19.68 R1.1
N$3
  Top 0.406: U10.4 13.72,35.08 C22.1
N$4
  Top 0.203: U10.3 12.33,31.06 R2.1
N$5  (1 unrouted)
  Top 0.203: U11.P$126 67.78,34.66 70.71,37.59 71.73,37.59 72.14,38 Y1.P$2
N$6  (1 unrouted)
  Top 0.203: U11.P$125 67.91,34.26 70.84,37.19 71.73,37.19 72.14,36.78 Y1.P$1
N$7
  Top 0.203: U11.P$127 67.67,35.06 68.11,35.5 R3.2
N$8
  Top 0.203: U11.P$96 66.17,22.06 C58.1 66.67,21.56 68.28,21.56 | 68.03,21.56 68.28,21.56 | 68.28,21.56 69.55,21.56 R4.1
N$9
  Top 0.152: 27.75,18.99 27.64,18.88 | 27.75,18.99 Y2.P$1 | 29.95,21.95 29.95,21.82 | 27.64,19.1 27.75,18.99
  Top 0.203: C66.1 27.64,18.88 | U12.15 29.95,21.95 29.95,21.82 29.26,21.13 26.82,21.13 26.42,20.73 26.42,19.51 26.82,19.1 27.64,19.1
N$10
  Top 0.152: Y2.P$2 24.38,18.88
  Top 0.203: C67.1 24.38,18.88 | Y2.P$2 25.2,19.1 25.6,19.51 25.6,20.73 26.42,21.54 28.99,21.54 29.45,22 U12.14
N$11
  Top 0.203: U12.16 30.45,20.33 R5.2
N$12
  Top 0.203: U12.47 29.45,32.77 C68.1 29.46,33.08 R6.1
N$13  (1 unrouted)
N$14  (1 unrouted)
N$15  (1 unrouted)
N$16  (1 unrouted)
N$17  (1 unrouted)
N$18  (1 unrouted)
N$19  (1 unrouted)
N$20  (1 unrouted)
N$21  (2 unrouted)
N$22  (2 unrouted)
N$23  (1 unrouted)
N$24  (1 unrouted)
N$25  (1 unrouted)
N$26  (1 unrouted)
N$27  (1 unrouted)
N$28  (1 unrouted)
N$29  (1 unrouted)
N$30  (1 unrouted)
N$31  (1 unrouted)
N$32  (1 unrouted)
N$33  (1 unrouted)
N$34  (1 unrouted)
N$35  (1 unrouted)
PHY1->PI1_N
  Top 0.203: U11.P$5 63.53,40.21 66.78,43.46 79.99,43.46 85.14,48.61 85.14,50.32 RJ1.3
PHY1->PI1_P
  Top 0.203: U11.P$4 63.93,40.1 66.93,43.1 80.13,43.1 85.13,48.09 RJ1.6
PHY1LED0  (1 unrouted)
PHY1LED1  (1 unrouted)
PHY2->PI2_N
  Top 0.203: U11.P$16 59.13,38.36 58.34,39.14 58.34,43.97 62.77,48.39 63.21,48.39 RJ2.3
PHY2->PI2_P
  Top 0.203: U11.P$15 59.53,38.46 58.7,39.29 58.7,43.82 62.91,48.03 69.21,48.03 RJ2.6
PHY2LED0  (1 unrouted)
PHY2LED1  (1 unrouted)
PHY3->PI3_N
  Top 0.203: U11.P$27 54.73,37.88 49.1,43.51 46.66,43.51 44.93,45.24 44.93,50.11 RJ3.3
PHY3->PI3_P
  Top 0.203: U11.P$26 55.13,37.99 49.25,43.87 46.81,43.87 45.29,45.39 45.29,47.35 46.04,48.09 RJ3.6
PHY3LED0  (1 unrouted)
PHY3LED1  (2 unrouted)
PHY4->PI4_N
  Top 0.203: U11.P$38 49.36,33.46 48.84,32.94 41.79,32.94 34.47,40.26 28.78,40.26 24.41,44.63 24.41,49.58 RJ4.3
PHY4->PI4_P
  Top 0.203: U11.P$37 49.26,33.86 48.69,33.3 41.93,33.3 34.62,40.62 28.93,40.62 24.77,44.78 24.77,46.74 26.12,48.09 RJ4.6
PHY4LED0  (1 unrouted)
PHY4LED1  (2 unrouted)
PHY5A_N  (via drill 0.35)
  Top 0.203: U11.P$113 68.53,29.46 69.36,28.63 82.07,28.63 82.5,29.06 v83.72,29.06
  Bottom 0.203: v83.72,29.06 83.72,30.02 84.81,31.11 89.03,31.11 CN1.2
PHY5A_P  (via drill 0.35)
  Top 0.203: U11.P$112 68.43,29.06 69.22,28.27 82.88,28.27 v82.91,28.25
  Bottom 0.203: v82.91,28.25 82.91,29.71 84.66,31.47 89.08,31.47 89.16,31.55 91.29,31.55 CN1.1
PHY5B_N  (via drill 0.35)
  Top 0.203: U11.P$116 80.44,30.66 v80.47,30.68
  Bottom 0.203: v80.47,30.68 80.47,29.01 82.43,27.05 89.03,27.05 CN1.6
PHY5B_P  (via drill 0.35)
  Top 0.203: U11.P$115 79.87,30.26 80.26,29.87 v81.28,29.87
  Bottom 0.203: v81.28,29.87 81.28,28.7 82.57,27.41 86.97,27.41 86.97,27.43 89,29.46 91.24,29.46 CN1.3
PHY5C_N
  Top 0.203: U11.P$118 70.02,31.46 70.39,31.82 82.42,31.82 84.81,29.44 89.08,29.44 89.16,29.52 89.96,29.52 90.53,28.95 90.53,28.35 CN1.5
PHY5C_P
  Top 0.203: U11.P$117 70.12,31.06 70.58,31.52 82.22,31.52 84.66,29.08 89.03,29.08 CN1.4
PHY5D_N  (via drill 0.35)
  Top 0.203: U11.P$121 68.38,32.66 69.22,33.5 76.78,33.5 v77.22,33.93
  Bottom 0.203: v77.22,33.93 77.22,31.25 83.29,25.17 88.88,25.17 CN1.8
PHY5D_P  (via drill 0.35)
  Top 0.203: U11.P$120 68.48,32.26 69.36,33.15 78,33.15 v78.03,33.12
  Bottom 0.203: v78.03,33.12 78.03,30.93 83.44,25.53 91.31,25.53 CN1.7
PHY5LED0
  Top 0.203: U11.P$102 82.89,25.06 CN1.10
PHY5LED1
  Top 0.203: U11.P$103 85.69,25.46 88.19,22.96 91.24,22.96 93.27,24.99 93.27,31.9 90.83,34.34 87.58,34.34 86.97,34.95 84.43,34.95 CN1.12
PHY6->PI5_N
  Top 0.203: U12.9 25.73,25.57 24.31,24.16 20.19,24.16 19.07,25.27 19.07,46.61 14.91,50.77 11.4,50.77 10.36,51.82 6.82,51.82 RJ5.3
PHY6->PI5_P
  Top 0.203: U12.10 25.73,25.07 24.46,23.8 20.04,23.8 18.72,25.12 18.72,46.46 14.76,50.42 11.59,50.42 RJ5.6
PHY6-COL
  Top 0.203: U11.P$51 46.63,28.26 46.59,28.22 43.69,28.22 38.69,33.22 34.25,33.22 32.95,31.92 U12.40
PHY6-CRS  (via drill 0.35)
  Top 0.203: U11.P$60 49.01,24.66 48.66,24.31 47.35,24.31 46.8,23.75 45.95,23.75 v45.31,24.38 | U12.41 32.45,29.32 v32.51,29.26
  Bottom 0.203: v45.31,24.38 43.91,25.78 35.99,25.78 v32.51,29.26
PHY6-RXC
  Top 0.203: U11.P$57 48.7,25.86 48.22,25.38 47.69,25.38 47.5,25.57 U12.28
PHY6-RXD0  (via drill 0.35)
  Top 0.203: U12.23 33.95,21.81 36.19,19.57 36.19,19.28 v36.58,18.9 38.2,18.9 38.61,18.49 R31.2 | U11.P$65 52.73,21.03 52.22,20.52 v50.8,20.52
  Bottom 0.203: v36.58,18.9 36.93,19.25 49.53,19.25 v50.8,20.52
PHY6-RXD1  (via drill 0.35)  (1 unrouted)
  Top 0.203: v35.56,19.3 35.18,19.69 35.18,19.97 33.45,21.7 U12.22 | U11.P$64 50.29,23.06 49.78,22.55 v49.78,21.13
  Bottom 0.203: v35.56,19.3 35.87,19.61 48.26,19.61 v49.78,21.13
PHY6-RXD2  (via drill 0.35)  (1 unrouted)
  Top 0.203: U12.21 32.95,21.59 34.16,20.38 34.16,20.09 v34.54,19.71 34.54,18.12 R30.2 | U11.P$63 49.67,23.46 48.77,22.55 v48.77,21.74
  Bottom 0.203: v34.54,19.71 34.54,19.96 46.99,19.96 v48.77,21.74
PHY6-RXD3  (via drill 0.35)  (1 unrouted)
  Top 0.203: U12.20 32.45,21.2 v33.53,20.12 R29.2 | v47.75,22.35 48.34,22.94 48.42,22.94 49.34,23.86 U11.P$62
  Bottom 0.203: v33.53,20.12 33.75,20.34 34.81,20.34 34.83,20.32 45.72,20.32 v47.75,22.35
PHY6-RXDV
  Top 0.203: U11.P$58 48.8,25.46 48.36,25.02 47.55,25.02 47.49,25.07 U12.27
PHY6-RXER  (via drill 0.35)
  Top 0.203: U11.P$59 48.91,25.06 48.51,24.67 46.81,24.67 v46.53,24.38 | U12.29 41.72,26.07 v42.06,26.42
  Bottom 0.203: v42.06,26.42 44.5,26.42 v46.53,24.38
PHY6-TXC  (via drill 0.35)
  Top 0.203: U11.P$48 48.85,29.46 48.42,29.04 47.9,29.04 47.72,29.21 47.4,29.21 v46.74,29.87 | U12.33 37.76,28.07 v37.8,28.04
  Bottom 0.203: v37.8,28.04 37.8,28.45 38.61,29.26 45.31,29.26 45.92,29.87 v46.74,29.87
PHY6-TXD0
  Top 0.203: U12.35 38.74,29.07 38.75,29.08 40.82,29.08 43.24,26.66 U11.P$55
PHY6-TXD1
  Top 0.203: U12.36 40.83,29.57 43.34,27.06 U11.P$54
PHY6-TXD2
  Top 0.203: U12.38 33.95,31.92 34.54,32.51 38.4,32.51 43.45,27.46 U11.P$53
PHY6-TXD3
  Top 0.203: U12.39 33.45,31.92 34.4,32.87 38.54,32.87 43.55,27.86 U11.P$52
PHY6-TXEN  (via drill 0.35)
  Top 0.203: v46.33,28.85 47.57,28.85 47.75,28.68 48.57,28.68 48.95,29.06 U11.P$49 | U12.34 37.43,28.57 37.53,28.67 38.79,28.67 v39.01,28.45
  Bottom 0.203: v39.01,28.45 45.92,28.45 v46.33,28.85
PHY6LED0  (1 unrouted)
PHY6LED1  (1 unrouted)
PI1->PHY1_N
  Top 0.203: U11.P$2 64.73,40.19 67.19,42.65 82.83,42.65 86.73,46.55 RJ1.7
PI1->PHY1_P
  Top 0.203: U11.P$1 65.13,40.09 67.33,42.29 82.98,42.29 86.24,45.55 RJ1.8
PI2->PHY2_N
  Top 0.203: U11.P$13 60.33,40.26 64.95,44.88 66.45,44.88 66.73,45.16 RJ2.7
PI2->PHY2_P
  Top 0.203: U11.P$12 60.73,40.16 65.1,44.53 66.59,44.53 67.62,45.55 RJ2.8
PI3->PHY3_N
  Top 0.203: U11.P$25 55.53,38.3 50.37,43.46 | 50.37,43.46 50.27,43.56 | 50.37,43.46 49.28,44.55 48.85,44.55 48.26,45.14 48.26,45.29 RJ3.7
PI3->PHY3_P
  Top 0.203: U11.P$24 55.93,38.41 49.27,45.06 RJ3.8
PI4->PHY4_N
  Top 0.203: U11.P$35 41.29,34.66 34.88,41.07 29.39,41.07 27.66,42.8 27.66,45.89 RJ4.7
PI4->PHY4_P
  Top 0.203: U11.P$34 41.39,35.06 35.02,41.43 29.54,41.43 28.02,42.95 28.02,44.5 29.07,45.55 RJ4.8
PI5->PHY6_N
  Top 0.203: U12.11 25.95,24.57 24.72,23.34 19.78,23.34 18.26,24.86 18.26,44.78 16.13,46.91 10.57,46.91 | 10.57,46.91 10.36,46.91 | 10.57,46.91 6.82,46.91 RJ5.7
PI5->PHY6_P
  Top 0.203: U12.12 25.95,24.07 24.86,22.99 19.64,22.99 17.91,24.72 17.91,44.63 15.98,46.56 10.27,46.56 RJ5.8
STM32-ETH-CRSDV  (1 unrouted)
STM32-ETH-REFCLK  (2 unrouted)
STM32-ETH-RXD0  (1 unrouted)
STM32-ETH-RXD1  (1 unrouted)
STM32-ETH-TXD0  (1 unrouted)
STM32-ETH-TXD1  (1 unrouted)
STM32-ETH-TXEN  (1 unrouted)
VCCIO  (via drill 0.33, 0.35)  (44 unrouted)
  Top 0.203: 57.53,18.96 C55.1 | 65.31,23.86 v64.82,23.37 | v48.16,23.57 48.54,23.95 48.81,23.95 49.11,24.26
  Top 0.254: U12.25 36.89,24.07 37.39,23.57 38.16,23.57 C61.1 C62.1 | 68.53,23.86 R32.2 R4.2
  Bottom 0.203: C56.1 64.66,23.53 v64.82,23.37 | C54.1 48.97,24.38 v48.16,23.57